# EAGLE board PCB-Board (EAGLE 9.0.1)
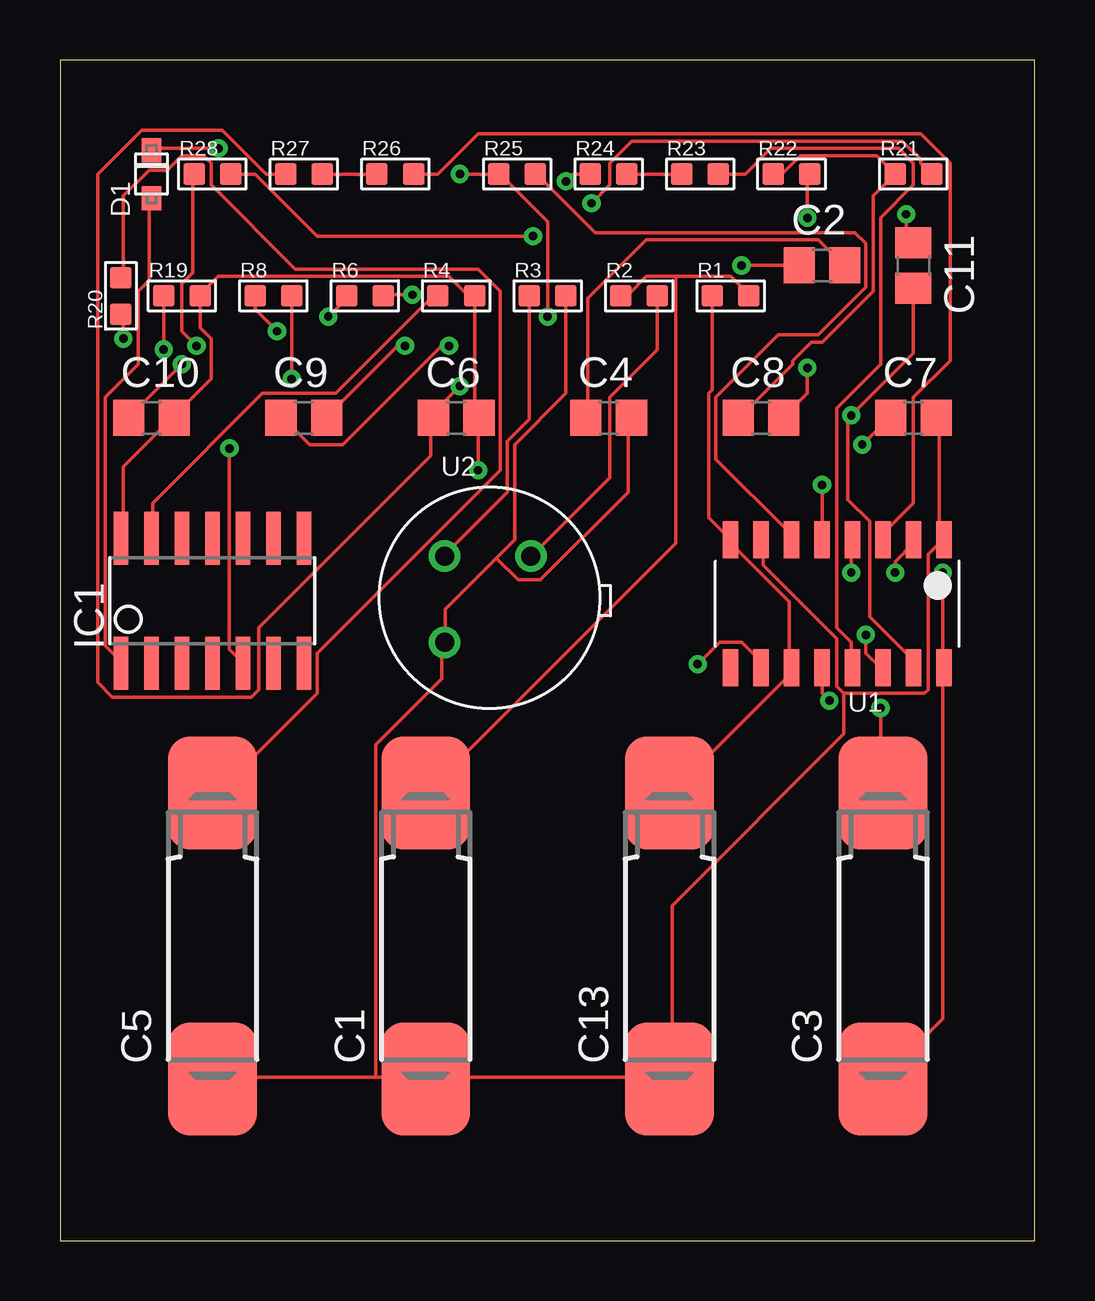
[diagram p0: board, top side]
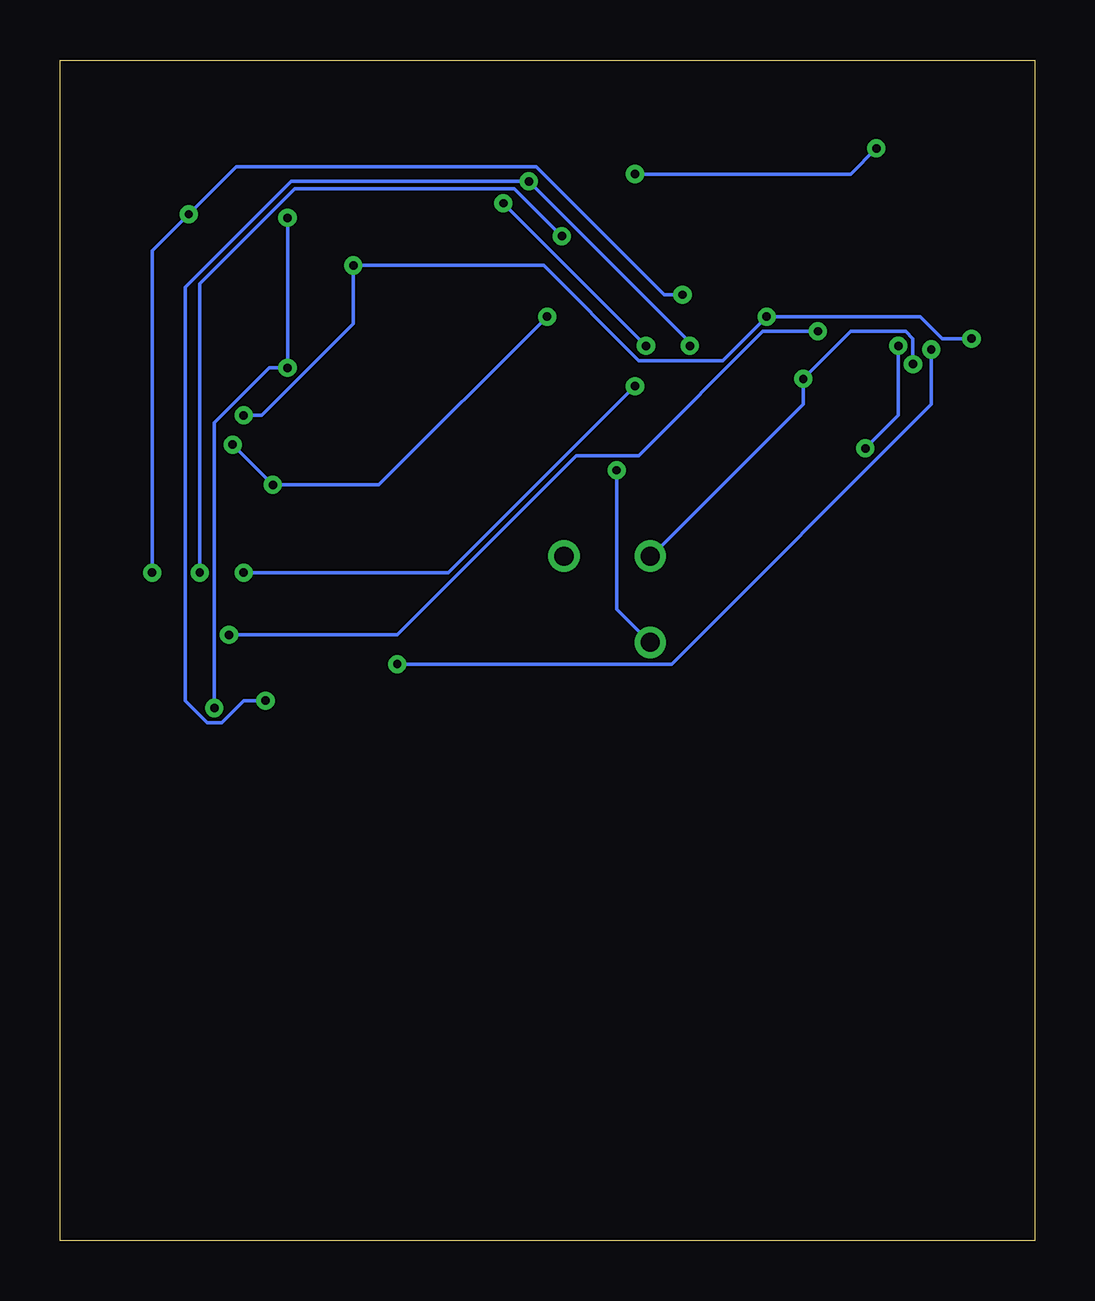
[diagram p1: board, bottom side, seen from below]

Size 40.62 x 49.2 mm. Coordinates in mm from the lower left corner, seen from the top.
Outline: 0,0 40.62,0 40.62,49.2 0,49.2 0,0
Copper layers (1*16): Top 0.035mm / dielectric 1.5mm / Bottom 0.035mm
Design rules "default": minimum track width 6mil, minimum drill 0.35mm, track to track 6mil, track to pad 6mil, pad to pad 6mil, via to via 6mil, smd to smd 6mil, copper to edge 40mil, drill to drill 6mil, minimum pad ring 10mil, minimum via ring 8mil, stop-mask expansion 4mil, vias tented up to drill 0mil, thermal gap 10mil

## Footprints (pad centres in the part's own frame; a part is rotated, then mirrored left to right if it is on the bottom)
085CS_1W = smd 4.7 x 3.7: + 5.95,0; - -5.95,0
C0805 = smd 1.3 x 1.5: 1 -0.95,0; 2 0.95,0
SOD-323F = smd 1 x 0.8: A -1,0; C 1,0
SOIC14 = smd 0.61 x 2.21: 1 -3.81,-2.603; 2 -2.54,-2.603; 3 -1.27,-2.603; 4 0,-2.603; 5 1.27,-2.603; 6 2.54,-2.603; 7 3.81,-2.603; 8 3.81,2.603; 9 2.54,2.603; 10 1.27,2.603; 11 0,2.603; 12 -1.27,2.603; 13 -2.54,2.603; 14 -3.81,2.603
R0603 = smd 0.889 x 0.889: 1 -0.762,0; 2 0.762,0
SOP16 = smd 0.635 x 1.524: 1 0,0; 2 1.27,0; 3 2.54,0; 4 3.81,0; 5 5.08,0; 6 6.35,0; 7 7.62,0; 8 8.89,0; 9 8.89,5.334; 10 7.62,5.334; 11 6.35,5.334; 12 5.08,5.334; 13 3.81,5.334; 14 2.54,5.334; 15 1.27,5.334; 16 0,5.334
RE200B = drill 0.8: 1 1.838,1.856; 2 -1.754,1.856; 3 -1.754,-1.736

## Placement (x,y rotation side)
C1  47uF  [085CS_1W]  15.24,12.7 90 top
C2  5nF  [C0805]  31.75,40.64 0 top
C3  22uF  [085CS_1W]  34.29,12.7 90 top
C4  10nF  [C0805]  22.86,34.29 0 top
C5  47uF  [085CS_1W]  6.35,12.7 90 top
C6  10nF  [C0805]  16.51,34.29 0 top
C7  100nF  [C0805]  35.56,34.29 0 top
C8  100nF  [C0805]  29.21,34.29 0 top
C9  10nF  [C0805]  10.16,34.29 0 top
C10  10nF  [C0805]  3.81,34.29 0 top
C11  10nF  [C0805]  35.56,40.64 270 top
C13  22uF  [085CS_1W]  25.4,12.7 90 top
D1  [SOD-323F]  3.81,44.45 90 top
IC1  ATTINY24/44/84-SSU  [SOIC14]  6.35,26.67 0 top
R1  10K  [R0603]  27.94,39.37 0 top
R2  18k  [R0603]  24.13,39.37 0 top
R3  47k  [R0603]  20.32,39.37 0 top
R4  10K  [R0603]  16.51,39.37 0 top
R6  1M  [R0603]  12.7,39.37 0 top
R8  18k  [R0603]  8.89,39.37 0 top
R19  1M  [R0603]  5.08,39.37 0 top
R20  18k  [R0603]  2.54,39.37 90 top
R21  6.8k  [R0603]  35.56,44.45 0 top
R22  2k  [R0603]  30.48,44.45 0 top
R23  470k  [R0603]  26.67,44.45 0 top
R24  10K  [R0603]  22.86,44.45 0 top
R25  1M  [R0603]  19.05,44.45 0 top
R26  10K  [R0603]  13.97,44.45 0 top
R27  10K  [R0603]  10.16,44.45 0 top
R28  1k  [R0603]  6.35,44.45 0 top
U1  BISS0001SMD  [SOP16]  36.83,29.21 180 top
U2  RE200B  [RE200B]  17.78,26.67 0 top

## Library data of the parts
C1 C3 C5 C13 D1 = adafruit; OC_NEWARK: unknown
C2 C4 C6-C11 = eagle-ltspice; OC_NEWARK: unknown; SPICEMODEL: NONE; SPICEPREFIX: C
IC1 = attiny24_44_84; OC_NEWARK: unknown
R1-R4 R6 R8 R19-R28 = Discrete; OC_NEWARK: unknown
U1 U2 = seeedleo; OC_NEWARK: unknown

## Nets
GND: C1.- C4.2 C5.- C6.2 C7.2 C10.2 C13.- IC1.14 R3.2 R4.2 R19.2 U1.1 U1.7 U2.3
N$1: R2.2 U2.1
N$2: C1.+ R1.2 R2.1
N$3: IC1.6
N$4: R19.1 U1.10
N$6: IC1.7
N$7: R23.2 U1.13
N$8: R8.1 U1.14
N$9: C10.1 R3.1 R8.2 U2.2
N$10: C3.- C11.1 R6.2 U1.16
N$11: C8.1 R21.1 R22.1
N$12: C9.1 R21.2
N$13: C5.+ R20.2
N$14: C2.1 C11.2 R6.1 R20.1 U1.15
N$15: C2.2 C4.1
N$16: R25.2 U1.6
N$17: R23.1 R24.2
N$18: C6.1 R27.1 U1.4
N$19: R26.2 U1.3
N$20: C7.1 D1.C R25.1 U1.5
N$21: C9.2 R24.1 U1.12
N$22: R28.2 U1.2
N$23: R26.1 R27.2
N$24: U1.9
N$25: IC1.5 R28.1
N$26: C13.+ R1.1 U1.8 U1.11
N$27: C3.+ C8.2 R22.2
N$28: IC1.8
N$29: IC1.9
N$30: IC1.10
N$31: IC1.11
N$33: D1.A IC1.1
N$35: IC1.13 R4.1

## Tracks (layer width: path | path; a pad name or v marks a point on that pad's centre or on a via)
GND  (via drill 0.35)
  Top 0.152: IC1.14 2.64,29.36 2.64,32.26 4.62,34.24 C10.2 4.78,34.39 6.3,35.92 6.3,37.59 5.84,38.05 R19.2 5.84,39.42 6.6,40.18 16.2,40.18 16.97,39.42 17.27,39.42 R4.2 17.27,34.54 17.42,34.39 C6.2 17.42,34.24 v17.42,32.11 | R3.2 21.08,35.31 18.95,33.17 18.95,29.21 18.19,28.45 | 18.19,28.45 16.05,26.31 16.05,24.94 U2.3 15.9,24.79 15.9,23.42 13.16,20.68 13.16,6.81 | 18.19,28.45 19.1,27.53 20.02,27.53 23.67,31.19 23.67,34.24 C4.2 | 36.78,29.21 36.63,29.36 36.63,34.24 C7.2 | 32.66,22.81 32.36,23.11 32.36,25.09 29.31,28.14 29.31,29.21 U1.7 | 32.66,22.81 36.02,22.81 36.17,22.96 36.17,28.6 36.78,29.21 | 36.78,29.21 U1.1 | 13.16,6.81 15.14,6.81 C1.- 15.29,6.81 25.35,6.81 C13.- 25.5,6.81 25.5,13.97 32.66,21.13 32.66,22.81 | 13.16,6.81 6.45,6.81 C5.-
  Bottom 0.152: v17.42,32.11 17.42,26.31 16.05,24.94 U2.3
N$1
  Top 0.152: R2.2 24.89,37.13 22.91,35.15 22.91,31.8 19.71,28.6 U2.1
N$2
  Top 0.152: 25.65,40.18 27.94,40.18 28.7,39.42 R1.2 | 25.65,40.18 24.43,40.18 23.67,39.42 23.37,39.42 R2.1 | 25.65,40.18 25.65,29.06 15.29,18.69 C1.+
N$4  (via drill 0.35)
  Top 0.152: v4.32,37.13 R19.1 | v26.57,24.03 27.48,24.94 28.4,24.94 29.16,24.18 29.16,23.88 U1.10
  Bottom 0.152: v4.32,37.13 4.32,34.85 15.14,24.03 v26.57,24.03
N$7
  Top 0.152: R23.2 28.55,44.45 29.62,45.52 34.95,45.52 35.56,44.91 35.56,43.99 34.19,42.62 34.19,36.52 32.36,34.7 32.36,25.55 32.97,24.94 32.97,23.88 U1.13
N$8  (via drill 0.35)
  Top 0.152: R8.1 8.13,38.81 v9.04,37.9 | v33.58,25.25 33.58,24.49 34.19,23.88 U1.14
  Bottom 0.152: v9.04,37.9 11.33,37.9 16.51,32.72 19.1,32.72 26.57,25.25 v33.58,25.25
N$9  (via drill 0.35)
  Top 0.152: v9.65,35.92 R8.2 | R3.1 19.56,34.24 18.64,33.33 18.64,31.19 16.05,28.6 U2.2 | v5.08,36.52 2.95,34.39 C10.1
  Bottom 0.152: U2.2 15.9,28.6 9.65,34.85 v9.65,35.92 7.67,37.9 5.38,37.9 5.08,37.59 v5.08,36.52
N$10  (via drill 0.35)
  Top 0.152: 36.78,23.88 36.78,9.25 34.34,6.81 C3.- | v14.68,39.42 13.46,39.42 R6.2 | v35.26,42.77 35.26,42.01 35.56,41.71 C11.1 | v36.78,27.84 36.78,23.88 | 36.78,23.88 U1.16
  Bottom 0.152: v14.68,39.42 15.44,39.42 20.78,44.76 33.27,44.76 v35.26,42.77 36.78,41.25 v36.78,27.84
N$11
  Top 0.152: R22.1 30.07,44.45 30.84,45.21 34.04,45.21 R21.1 33.88,43.54 33.88,39.57 31.75,37.44 31.29,37.44 30.53,36.68 30.53,36.52 28.4,34.39 C8.1
N$12  (via drill 0.35)
  Top 0.152: R21.2 35.87,44.91 35.87,45.06 35.1,45.82 23.82,45.82 22.91,44.91 22.91,43.99 v22.15,43.23 | v16.2,37.29 15.9,37.29 11.79,33.17 10.41,33.17 9.35,34.24 C9.1
  Bottom 0.152: v16.2,37.29 v22.15,43.23
N$13
  Top 0.152: R20.2 2.64,40.18 2.64,43.54 3.71,44.6 4.47,44.6 5.08,45.21 5.99,45.21 6.3,44.91 6.3,43.99 9.8,40.49 17.42,40.49 18.34,39.57 18.34,32.11 10.72,24.49 10.72,22.81 6.45,18.54 C5.+
N$14  (via drill 0.35)
  Top 0.152: C11.2 35.56,36.98 v32.97,34.39 32.82,34.24 32.82,30.89 33.73,29.97 33.73,26.01 35.56,24.18 U1.15 | v2.64,37.59 2.64,38.51 R20.1 | v11.18,38.51 11.94,39.27 R6.1 | v28.4,40.64 C2.1
  Bottom 0.152: v2.64,37.59 3.86,37.59 4.78,38.51 v11.18,38.51 13.01,36.68 16.51,36.68 20.47,40.64 v28.4,40.64 28.4,38.2 32.21,34.39 v32.97,34.39
N$15
  Top 0.152: C4.1 22,34.39 22,39.27 24.43,41.71 31.6,41.71 32.66,40.64 C2.2
N$16
  Top 0.152: R25.2 19.86,44.45 22.3,42.01 33.12,42.01 33.58,41.55 33.58,39.73 31.6,37.74 29.92,37.74 27.33,35.15 27.33,32.56 30.38,29.52 30.38,29.21 U1.6
N$17
  Top 0.152: R23.1 R24.2
N$18  (via drill 0.35)
  Top 0.152: R27.1 8.59,44.45 6.76,46.28 3.4,46.28 1.57,44.45 1.57,23.27 2.18,22.66 7.98,22.66 8.28,22.96 8.28,25.55 15.44,32.72 15.44,34.24 C6.1 15.44,34.39 v16.66,35.61 | v32.97,27.84 32.97,29.21 U1.4
  Bottom 0.152: v32.97,27.84 24.43,27.84 v16.66,35.61
N$19
  Top 0.152: R26.2 15.75,44.45 17.42,46.13 35.87,46.13 37.08,44.91 37.08,36.68 35.56,35.15 35.56,30.73 34.34,29.52 34.34,29.21 U1.3
N$20  (via drill 0.35)
  Top 0.152: v33.43,33.17 34.49,34.24 C7.1 | U1.5 v31.75,31.5 | v16.66,44.45 R25.1 18.34,44.45 20.32,42.47 v20.32,38.51 | v6.6,45.52 3.86,45.52 D1.C
  Bottom 0.152: v33.43,33.17 v31.75,31.5 27.33,31.5 v20.32,38.51 | v16.66,44.45 7.67,44.45 v6.6,45.52
N$21  (via drill 0.35)
  Top 0.152: R24.1 21.39,44.45 v21.08,44.15 | v14.38,37.29 14.07,37.29 11.18,34.39 C9.2 | U1.12 31.75,22.81 v32.05,22.5
  Bottom 0.152: v14.38,37.29 14.38,37.44 v21.08,44.15 30.99,44.15 35.41,39.73 35.41,22.5 34.49,21.59 33.88,21.59 32.97,22.5 v32.05,22.5
N$22  (via drill 0.35)
  Top 0.152: R28.2 8.13,44.45 10.72,41.86 v19.71,41.86 | v34.8,27.84 34.8,28.3 35.56,29.06 U1.2
  Bottom 0.152: v19.71,41.86 21.69,43.84 30.84,43.84 34.8,39.88 v34.8,27.84
N$23
  Top 0.152: R26.1 R27.2
N$25  (via drill 0.35)
  Top 0.152: v5.69,37.29 5.08,37.9 5.08,39.88 5.54,40.34 5.54,44.45 R28.1 | v7.06,33.02 7.06,24.64 7.52,24.18 IC1.5
  Bottom 0.152: v5.69,37.29 5.69,34.39 v7.06,33.02
N$26
  Top 0.152: R1.1 27.18,35.46 27.03,35.31 27.03,30.12 U1.8 27.94,29.06 30.38,26.62 30.38,23.88 | 30.38,23.88 30.38,23.57 25.5,18.69 C13.+ | 30.38,23.88 U1.11
N$27  (via drill 0.35)
  Top 0.152: v31.14,42.62 31.14,44.45 R22.2 | v31.14,36.37 31.14,35.31 30.23,34.39 C8.2 | v34.19,22.2 34.19,18.69 C3.+
  Bottom 0.152: v31.14,42.62 v31.14,36.37 31.9,36.37 34.19,34.09 v34.19,22.2
N$33
  Top 0.152: D1.A 3.71,43.38 3.71,40.03 3.25,39.57 3.25,36.52 1.88,35.15 1.88,24.79 2.49,24.18 IC1.1
N$35
  Top 0.152: R4.1 15.75,39.27 15.44,39.27 11.48,35.31 8.43,35.31 3.86,30.73 3.86,29.36 IC1.13